# EAGLE board SP-PC-2.brd.ok (EAGLE 7.6.0)
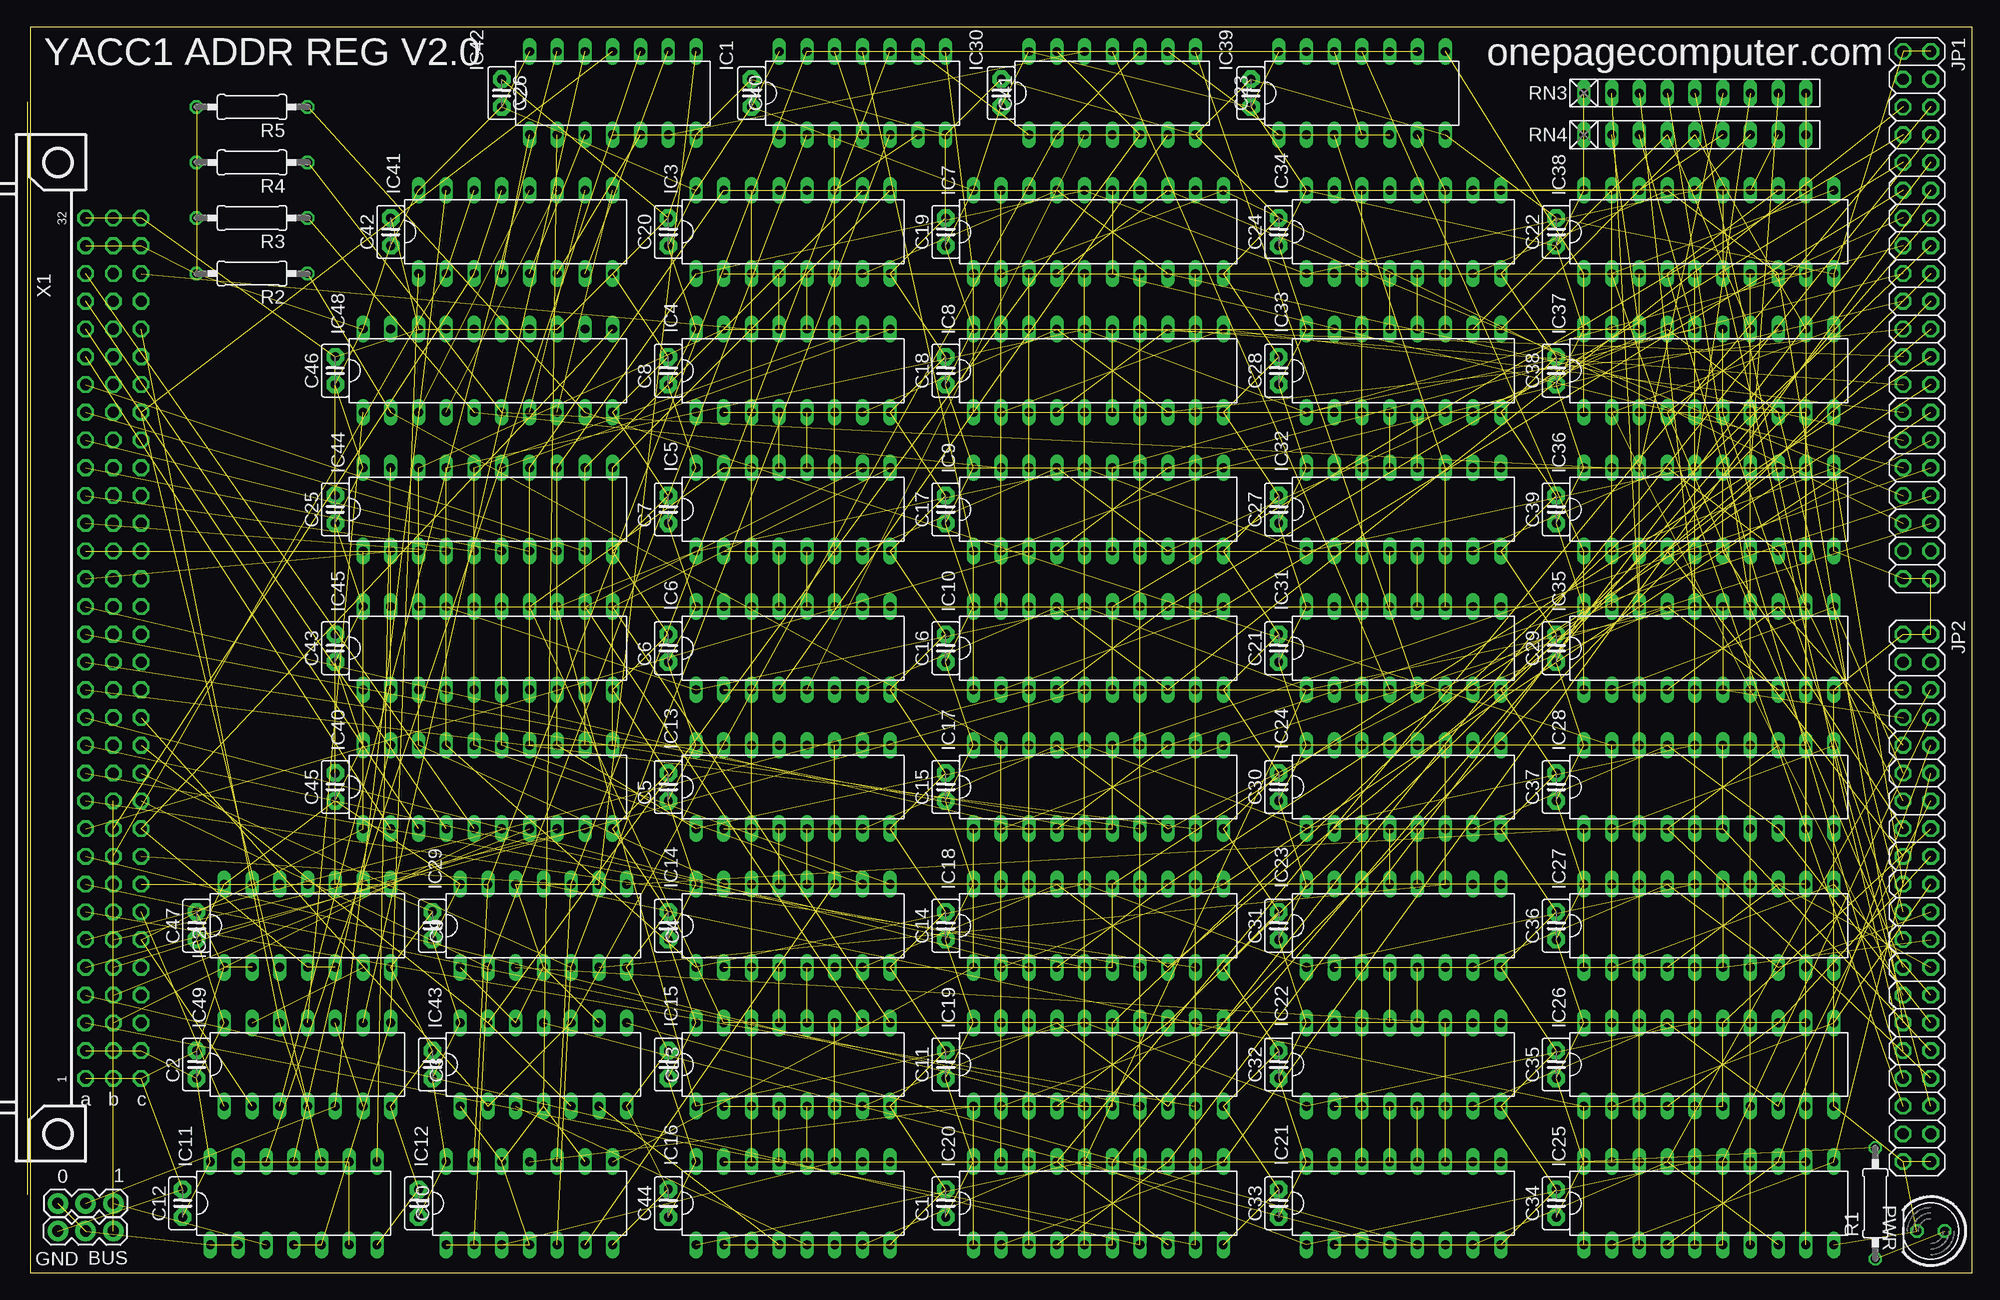
[diagram p0: board, top side]
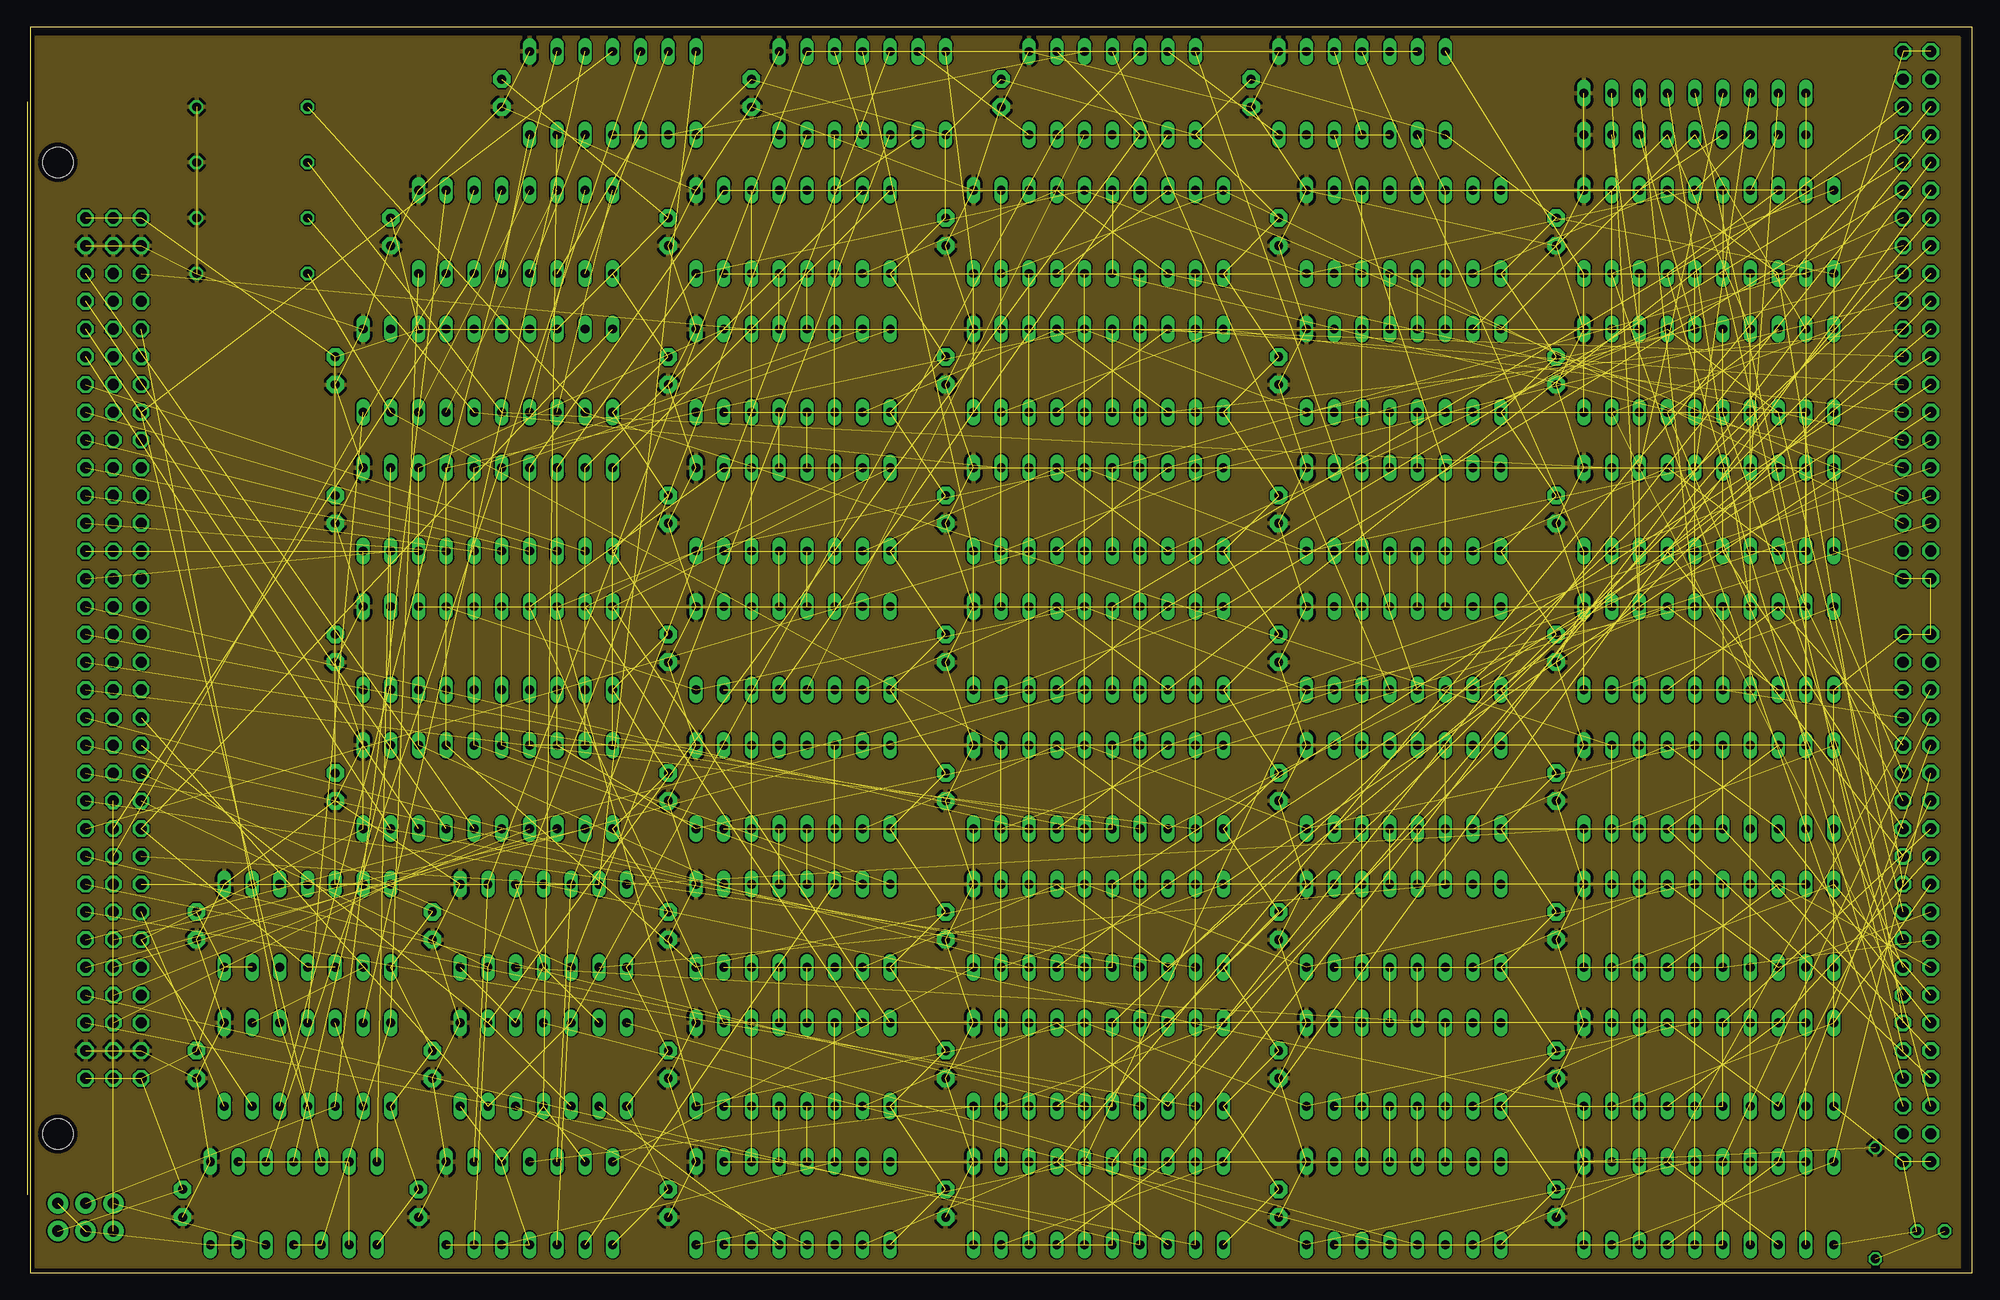
[diagram p1: board, inner layer Route2]
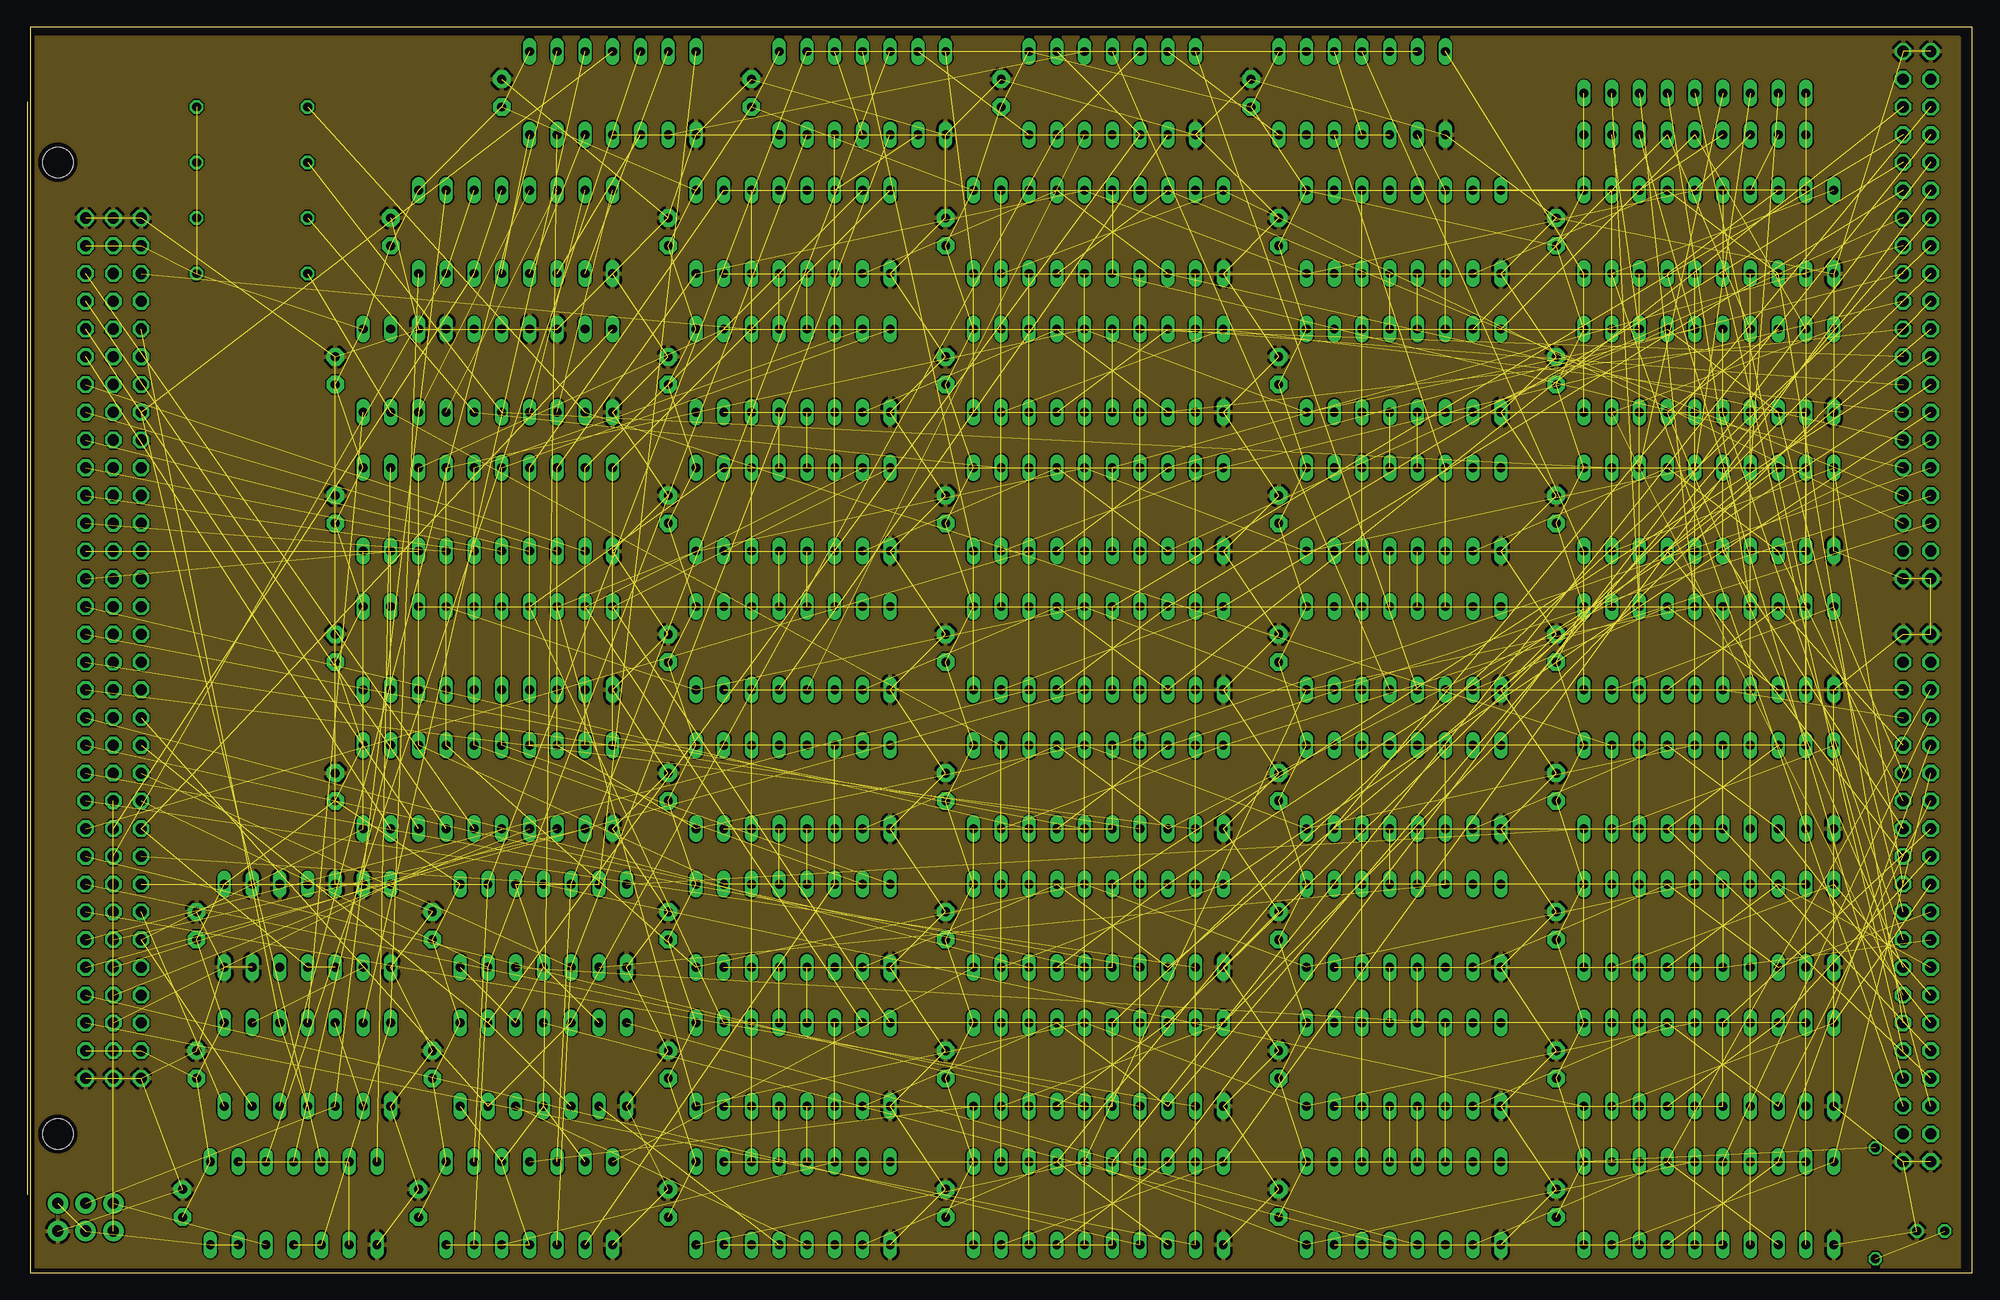
[diagram p2: board, inner layer Route15]

Size 177.78 x 113.97 mm. Coordinates in mm from the lower left corner, seen from the top.
Outline: 0,0 177.78,0 177.78,113.97 0,113.97 0,0
Copper layers (1*2*15*16): Top 0.035559375mm / dielectric 0.17018125mm / Route2 0.01778125mm / dielectric 47mil / Route15 0.01778125mm / dielectric 0.17018125mm / Bottom 0.035559375mm
Design rules "YACC1-OSHPark-4layer": minimum track width 5mil, minimum drill 10mil, track to track 5mil, track to pad 5mil, pad to pad 5mil, via to via 5mil, smd to smd 5mil, copper to edge 15mil, drill to drill 6mil, minimum pad ring 4mil, minimum via ring 4mil, stop-mask expansion 2.5mil, vias tented up to drill 0mil, thermal gap 10mil

## Footprints (pad centres in the part's own frame; a part is rotated, then mirrored left to right if it is on the bottom)
1X03 = drill 1.016 pad 1.88: 1 0,0; 2 2.54,0; 3 5.08,0
C2.5-2 = drill 0.813 pad 1.6 octagon: 1 -1.27,0; 2 1.27,0
DIL14 = drill 0.813 long: 1 -7.62,-3.81; 2 -5.08,-3.81; 3 -2.54,-3.81; 4 0,-3.81; 5 2.54,-3.81; 6 5.08,-3.81; 7 7.62,-3.81; 8 7.62,3.81; 9 5.08,3.81; 10 2.54,3.81; 11 0,3.81; 12 -2.54,3.81; 13 -5.08,3.81; 14 -7.62,3.81
DIL16 = drill 0.813 long: 1 -8.89,-3.81; 2 -6.35,-3.81; 3 -3.81,-3.81; 4 -1.27,-3.81; 5 1.27,-3.81; 6 3.81,-3.81; 7 6.35,-3.81; 8 8.89,-3.81; 9 8.89,3.81; 10 6.35,3.81; 11 3.81,3.81; 12 1.27,3.81; 13 -1.27,3.81; 14 -3.81,3.81; 15 -6.35,3.81; 16 -8.89,3.81
DIL20 = drill 0.813 long: 1 -11.43,-3.81; 2 -8.89,-3.81; 3 -6.35,-3.81; 4 -3.81,-3.81; 5 -1.27,-3.81; 6 1.27,-3.81; 7 3.81,-3.81; 8 6.35,-3.81; 9 8.89,-3.81; 10 11.43,-3.81; 11 11.43,3.81; 12 8.89,3.81; 13 6.35,3.81; 14 3.81,3.81; 15 1.27,3.81; 16 -1.27,3.81; 17 -3.81,3.81; 18 -6.35,3.81; 19 -8.89,3.81; 20 -11.43,3.81
2X20 = drill 1.016 octagon: 1 -24.13,-1.27; 2 -24.13,1.27; 3 -21.59,-1.27; 4 -21.59,1.27; 5 -19.05,-1.27; 6 -19.05,1.27; 7 -16.51,-1.27; 8 -16.51,1.27; 9 -13.97,-1.27; 10 -13.97,1.27; 11 -11.43,-1.27; 12 -11.43,1.27; 13 -8.89,-1.27; 14 -8.89,1.27; 15 -6.35,-1.27; 16 -6.35,1.27; 17 -3.81,-1.27; 18 -3.81,1.27; 19 -1.27,-1.27; 20 -1.27,1.27; 21 1.27,-1.27; 22 1.27,1.27; 23 3.81,-1.27; 24 3.81,1.27; 25 6.35,-1.27; 26 6.35,1.27; 27 8.89,-1.27; 28 8.89,1.27; 29 11.43,-1.27; 30 11.43,1.27; 31 13.97,-1.27; 32 13.97,1.27; 33 16.51,-1.27; 34 16.51,1.27; 35 19.05,-1.27; 36 19.05,1.27; 37 21.59,-1.27; 38 21.59,1.27; 39 24.13,-1.27; 40 24.13,1.27
LED5MM = drill 0.813 octagon: A -1.27,0; K 1.27,0
0207/10 = drill 0.813 octagon: 1 -5.08,0; 2 5.08,0
RN-9 = drill 0.813 long: 1 -10.16,0; 2 -7.62,0; 3 -5.08,0; 4 -2.54,0; 5 0,0; 6 2.54,0; 7 5.08,0; 8 7.62,0; 9 10.16,0
FABC96R = drill 1.016 octagon: A1 -2.54,39.37; A2 -2.54,36.83; A3 -2.54,34.29; A4 -2.54,31.75; A5 -2.54,29.21; A6 -2.54,26.67; A7 -2.54,24.13; A8 -2.54,21.59; A9 -2.54,19.05; A10 -2.54,16.51; A11 -2.54,13.97; A12 -2.54,11.43; A13 -2.54,8.89; A14 -2.54,6.35; A15 -2.54,3.81; A16 -2.54,1.27; A17 -2.54,-1.27; A18 -2.54,-3.81; A19 -2.54,-6.35; A20 -2.54,-8.89; A21 -2.54,-11.43; A22 -2.54,-13.97; A23 -2.54,-16.51; A24 -2.54,-19.05; A25 -2.54,-21.59; A26 -2.54,-24.13; A27 -2.54,-26.67; A28 -2.54,-29.21; A29 -2.54,-31.75; A30 -2.54,-34.29; A31 -2.54,-36.83; A32 -2.54,-39.37; B1 -5.08,39.37; B2 -5.08,36.83; B3 -5.08,34.29; B4 -5.08,31.75; B5 -5.08,29.21; B6 -5.08,26.67; B7 -5.08,24.13; B8 -5.08,21.59; B9 -5.08,19.05; B10 -5.08,16.51; B11 -5.08,13.97; B12 -5.08,11.43; B13 -5.08,8.89; B14 -5.08,6.35; B15 -5.08,3.81; B16 -5.08,1.27; B17 -5.08,-1.27; B18 -5.08,-3.81; B19 -5.08,-6.35; B20 -5.08,-8.89; B21 -5.08,-11.43; B22 -5.08,-13.97; B23 -5.08,-16.51; B24 -5.08,-19.05; B25 -5.08,-21.59; B26 -5.08,-24.13; B27 -5.08,-26.67; B28 -5.08,-29.21; B29 -5.08,-31.75; B30 -5.08,-34.29; B31 -5.08,-36.83; B32 -5.08,-39.37; C1 -7.62,39.37; C2 -7.62,36.83; C3 -7.62,34.29; C4 -7.62,31.75; C5 -7.62,29.21; C6 -7.62,26.67; C7 -7.62,24.13; C8 -7.62,21.59; C9 -7.62,19.05; C10 -7.62,16.51; C11 -7.62,13.97; C12 -7.62,11.43; C13 -7.62,8.89; C14 -7.62,6.35; C15 -7.62,3.81; C16 -7.62,1.27; C17 -7.62,-1.27; C18 -7.62,-3.81; C19 -7.62,-6.35; C20 -7.62,-8.89; C21 -7.62,-11.43; C22 -7.62,-13.97; C23 -7.62,-16.51; C24 -7.62,-19.05; C25 -7.62,-21.59; C26 -7.62,-24.13; C27 -7.62,-26.67; C28 -7.62,-29.21; C29 -7.62,-31.75; C30 -7.62,-34.29; C31 -7.62,-36.83; C32 -7.62,-39.37 | hole 2.794: 0,-44.456; 0,44.456

## Placement (x,y rotation side)
0  [1X03]  2.54,6.35 0 top
BUS  [1X03]  7.62,3.81 180 top
C1  0.1  [C2.5-2]  83.82,6.35 90 top
C2  0.1  [C2.5-2]  15.24,19.05 90 top
C3  0.1  [C2.5-2]  36.83,19.05 90 top
C4  0.1  [C2.5-2]  58.42,31.75 90 top
C5  0.1  [C2.5-2]  58.42,44.45 90 top
C6  0.1  [C2.5-2]  58.42,57.15 90 top
C7  0.1  [C2.5-2]  58.42,69.85 90 top
C8  0.1  [C2.5-2]  58.42,82.55 90 top
C9  0.1  [C2.5-2]  36.83,31.75 90 top
C10  0.1  [C2.5-2]  35.56,6.35 90 top
C11  0.1  [C2.5-2]  83.82,19.05 90 top
C12  0.1  [C2.5-2]  13.97,6.35 90 top
C13  0.1  [C2.5-2]  58.42,19.05 90 top
C14  0.1  [C2.5-2]  83.82,31.75 90 top
C15  0.1  [C2.5-2]  83.82,44.45 90 top
C16  0.1  [C2.5-2]  83.82,57.15 90 top
C17  0.1  [C2.5-2]  83.82,69.85 90 top
C18  0.1  [C2.5-2]  83.82,82.55 90 top
C19  0.1  [C2.5-2]  83.82,95.25 90 top
C20  0.1  [C2.5-2]  58.42,95.25 90 top
C21  0.1  [C2.5-2]  114.3,57.15 90 top
C22  0.1  [C2.5-2]  139.7,95.25 90 top
C23  0.1  [C2.5-2]  111.76,107.95 90 top
C24  0.1  [C2.5-2]  114.3,95.25 90 top
C25  0.1  [C2.5-2]  27.94,69.85 90 top
C26  0.1  [C2.5-2]  43.18,107.95 90 top
C27  0.1  [C2.5-2]  114.3,69.85 90 top
C28  0.1  [C2.5-2]  114.3,82.55 90 top
C29  0.1  [C2.5-2]  139.7,57.15 90 top
C30  0.1  [C2.5-2]  114.3,44.45 90 top
C31  0.1  [C2.5-2]  114.3,31.75 90 top
C32  0.1  [C2.5-2]  114.3,19.05 90 top
C33  0.1  [C2.5-2]  114.3,6.35 90 top
C34  0.1  [C2.5-2]  139.7,6.35 90 top
C35  0.1  [C2.5-2]  139.7,19.05 90 top
C36  0.1  [C2.5-2]  139.7,31.75 90 top
C37  0.1  [C2.5-2]  139.7,44.45 90 top
C38  0.1  [C2.5-2]  139.7,82.55 90 top
C39  0.1  [C2.5-2]  139.7,69.85 90 top
C40  0.1  [C2.5-2]  66.04,107.95 90 top
C41  0.1  [C2.5-2]  88.9,107.95 90 top
C42  0.1  [C2.5-2]  33.02,95.25 90 top
C43  0.1  [C2.5-2]  27.94,57.15 90 top
C44  0.1  [C2.5-2]  58.42,6.35 90 top
C45  0.1  [C2.5-2]  27.94,44.45 90 top
C46  0.1  [C2.5-2]  27.94,82.55 90 top
C47  0.1  [C2.5-2]  15.24,31.75 90 top
IC1  7400N  [DIL14]  76.2,107.95 0 top
IC2  7400N  [DIL14]  25.4,31.75 0 top
IC3  74LS192N  [DIL16]  69.85,95.25 0 top
IC4  74LS192N  [DIL16]  69.85,82.55 0 top
IC5  74LS192N  [DIL16]  69.85,69.85 0 top
IC6  74LS192N  [DIL16]  69.85,57.15 0 top
IC7  74LS244N  [DIL20]  97.79,95.25 0 top
IC8  74LS244N  [DIL20]  97.79,82.55 0 top
IC9  74LS244N  [DIL20]  97.79,69.85 0 top
IC10  74LS244N  [DIL20]  97.79,57.15 0 top
IC11  7400N  [DIL14]  24.13,6.35 0 top
IC12  7400N  [DIL14]  45.72,6.35 0 top
IC13  74LS192N  [DIL16]  69.85,44.45 0 top
IC14  74LS192N  [DIL16]  69.85,31.75 0 top
IC15  74LS192N  [DIL16]  69.85,19.05 0 top
IC16  74LS192N  [DIL16]  69.85,6.35 0 top
IC17  74LS244N  [DIL20]  97.79,44.45 0 top
IC18  74LS244N  [DIL20]  97.79,31.75 0 top
IC19  74LS244N  [DIL20]  97.79,19.05 0 top
IC20  74LS244N  [DIL20]  97.79,6.35 0 top
IC21  74LS192N  [DIL16]  125.73,6.35 0 top
IC22  74LS192N  [DIL16]  125.73,19.05 0 top
IC23  74LS192N  [DIL16]  125.73,31.75 0 top
IC24  74LS192N  [DIL16]  125.73,44.45 0 top
IC25  74LS244N  [DIL20]  153.67,6.35 0 top
IC26  74LS244N  [DIL20]  153.67,19.05 0 top
IC27  74LS244N  [DIL20]  153.67,31.75 0 top
IC28  74LS244N  [DIL20]  153.67,44.45 0 top
IC29  7400N  [DIL14]  46.99,31.75 0 top
IC30  7400N  [DIL14]  99.06,107.95 0 top
IC31  74LS192N  [DIL16]  125.73,57.15 0 top
IC32  74LS192N  [DIL16]  125.73,69.85 0 top
IC33  74LS192N  [DIL16]  125.73,82.55 0 top
IC34  74LS192N  [DIL16]  125.73,95.25 0 top
IC35  74LS244N  [DIL20]  153.67,57.15 0 top
IC36  74LS244N  [DIL20]  153.67,69.85 0 top
IC37  74LS244N  [DIL20]  153.67,82.55 0 top
IC38  74LS244N  [DIL20]  153.67,95.25 0 top
IC39  7400N  [DIL14]  121.92,107.95 0 top
IC40  74LS245N  [DIL20]  41.91,44.45 0 top
IC41  74LS139N  [DIL16]  44.45,95.25 0 top
IC42  74LS04N  [DIL14]  53.34,107.95 0 top
IC43  7400N  [DIL14]  46.99,19.05 0 top
IC44  74LS245N  [DIL20]  41.91,69.85 0 top
IC45  74LS245N  [DIL20]  41.91,57.15 0 top
IC48  74LS374N  [DIL20]  41.91,82.55 0 top
IC49  74LS32N  [DIL14]  25.4,19.05 0 top
JP1  [2X20]  172.72,87.63 270 top
JP2  [2X20]  172.72,34.29 270 top
PWR  l1  [LED5MM]  173.99,3.81 180 top
R1  330  [0207/10]  168.91,6.35 90 top
R2  10k  [0207/10]  20.32,91.44 180 top
R3  10k  [0207/10]  20.32,96.52 180 top
R4  10k  [0207/10]  20.32,101.6 180 top
R5  10k  [0207/10]  20.32,106.68 180 top
RN3  [RN-9]  152.4,107.95 0 top
RN4  [RN-9]  152.4,104.14 0 top
X1  FABC96R  [FABC96R]  2.54,57.15 180 top

## Library data of the parts
0 BUS = SparkFun-Connectors
C1-C47 = capacitor-wima
IC1-IC45 IC48 IC49 = 74xx-us
JP1 JP2 = pinhead
PWR = led
R1 = eagle-ltspice; SPICEMODEL: NONE; SPICEPREFIX: R
R2-R5 = resistor
RN3 RN4 = resistor-net; OC_FARNELL: unknown; OC_NEWARK: unknown
X1 = con-vg

## Nets
-ADDR-ID2-SEL: 0.3 IC11.3
-BRD-SEL: 0.2 IC41.15 IC49.5
-BUS-EN: IC49.4 IC49.12 X1.C28
-INDIRECT0: IC41.6 IC42.5
-INDIRECT1: IC41.7 IC42.9
-IREG0-ADDR-OUT: IC35.19 IC36.19 IC37.19 IC38.19 IC48.6 R4.1
-IREG1-ADDR-OUT: IC25.19 IC26.19 IC27.19 IC28.19 IC48.9 R5.1
-PC-ADDR-OUT: IC17.19 IC18.19 IC19.19 IC20.19 IC48.2 R2.1
-SP: IC41.5 IC42.3
-SP-ADDR-OUT: IC7.19 IC8.19 IC9.19 IC10.19 IC48.5 R3.1
-SPC: IC41.4 IC42.1
AC-LD: X1.C21
AC-LD-INV: X1.C20
AC-RD: X1.C22
ADATA0: IC6.15 IC10.18 IC16.15 IC20.18 IC21.15 IC25.18 IC31.15 IC35.18 IC45.18 RN3.2
ADATA1: IC6.1 IC10.16 IC16.1 IC20.16 IC21.1 IC25.16 IC31.1 IC35.16 IC45.17 RN3.3
ADATA2: IC6.10 IC10.14 IC16.10 IC20.14 IC21.10 IC25.14 IC31.10 IC35.14 IC45.16 RN3.4
ADATA3: IC6.9 IC10.12 IC16.9 IC20.12 IC21.9 IC25.12 IC31.9 IC35.12 IC45.15 RN3.5
ADATA4: IC5.15 IC9.18 IC15.15 IC19.18 IC22.15 IC26.18 IC32.15 IC36.18 IC45.14 RN3.6
ADATA5: IC5.1 IC9.16 IC15.1 IC19.16 IC22.1 IC26.16 IC32.1 IC36.16 IC45.13 RN3.7
ADATA6: IC5.10 IC9.14 IC15.10 IC19.14 IC22.10 IC26.14 IC32.10 IC36.14 IC45.12 RN3.8
ADATA7: IC5.9 IC9.12 IC15.9 IC19.12 IC22.9 IC26.12 IC32.9 IC36.12 IC45.11 RN3.9
ADATA8: IC4.15 IC8.18 IC14.15 IC18.18 IC23.15 IC27.18 IC33.15 IC37.18 IC40.18 IC44.18 RN4.2
ADATA9: IC4.1 IC8.16 IC14.1 IC18.16 IC23.1 IC27.16 IC33.1 IC37.16 IC40.17 IC44.17 RN4.3
ADATA10: IC4.10 IC8.14 IC14.10 IC18.14 IC23.10 IC27.14 IC33.10 IC37.14 IC40.16 IC44.16 RN4.4
ADATA11: IC4.9 IC8.12 IC14.9 IC18.12 IC23.9 IC27.12 IC33.9 IC37.12 IC40.15 IC44.15 RN4.5
ADATA12: IC3.15 IC7.18 IC13.15 IC17.18 IC24.15 IC28.18 IC34.15 IC38.18 IC40.14 IC44.14 RN4.6
ADATA13: IC3.1 IC7.16 IC13.1 IC17.16 IC24.1 IC28.16 IC34.1 IC38.16 IC40.13 IC44.13 RN4.7
ADATA14: IC3.10 IC7.14 IC13.10 IC17.14 IC24.10 IC28.14 IC34.10 IC38.14 IC40.12 IC44.12 RN4.8
ADATA15: IC3.9 IC7.12 IC13.9 IC17.12 IC24.9 IC28.12 IC34.9 IC38.12 IC40.11 IC44.11 RN4.9
ADDR0: IC10.9 IC20.9 IC25.9 IC35.9 X1.A3
ADDR1: IC10.7 IC20.7 IC25.7 IC35.7 X1.A4
ADDR2: IC10.5 IC20.5 IC25.5 IC35.5 X1.A5
ADDR3: IC10.3 IC20.3 IC25.3 IC35.3 X1.A6
ADDR4: IC9.9 IC19.9 IC26.9 IC36.9 X1.A7
ADDR5: IC9.7 IC19.7 IC26.7 IC36.7 X1.A8
ADDR6: IC9.5 IC19.5 IC26.5 IC36.5 X1.A9
ADDR7: IC9.3 IC19.3 IC26.3 IC36.3 X1.A10
ADDR8: IC8.9 IC18.9 IC27.9 IC37.9 X1.A11
ADDR9: IC8.7 IC18.7 IC27.7 IC37.7 X1.A12
ADDR10: IC8.5 IC18.5 IC27.5 IC37.5 X1.A13
ADDR11: IC8.3 IC18.3 IC27.3 IC37.3 X1.A14
ADDR12: IC7.9 IC17.9 IC28.9 IC38.9 X1.A15
ADDR13: IC7.7 IC17.7 IC28.7 IC38.7 X1.A16
ADDR14: IC7.5 IC17.5 IC28.5 IC38.5 X1.A17
ADDR15: IC7.3 IC17.3 IC28.3 IC38.3 X1.A18
ADDR-ID0: IC41.2 IC41.14 X1.B9
ADDR-ID1: IC41.3 IC41.13 X1.B10
ADDR-ID2-SEL: 0.1 BUS.2 IC11.1 IC11.2
ADDR-REG-ADDR-RD: IC2.4 IC2.5 IC48.11 X1.C10
ADDR-REG-DATA-RD-HI: IC1.10 IC12.10 IC29.10 IC39.10 X1.C9
ADDR-REG-DATA-RD-LO: IC1.13 IC12.13 IC29.13 IC39.13 X1.C8
ADDR-REG-DN: IC30.5 IC30.13 IC43.5 IC43.13 X1.C13
ADDR-REG-FUNC: IC11.6 IC11.9 IC11.13
ADDR-REG-FUNC-LD: IC40.1 IC44.1 IC45.1 IC49.2 X1.C6
ADDR-REG-FUNC-RD: IC49.1 X1.C7
ADDR-REG-LD-HI: IC1.5 IC12.5 IC29.5 IC39.5 X1.C12
ADDR-REG-LD-LO: IC1.2 IC12.2 IC29.2 IC39.2 X1.C11
ADDR-REG-UP: IC30.2 IC30.10 IC43.2 IC43.10 X1.C14
ALU0: X1.C16
ALU1: X1.C17
ALU2: X1.C18
ALU3: X1.C19
ALU-FUNC: X1.C15
BR-COND: X1.C24
DATA0: IC44.2 IC45.2 X1.A19
DATA1: IC44.3 IC45.3 X1.A20
DATA2: IC44.4 IC45.4 X1.A21
DATA3: IC44.5 IC45.5 X1.A22
DATA4: IC44.6 IC45.6 X1.A23
DATA5: IC44.7 IC45.7 X1.A24
DATA6: IC44.8 IC45.8 X1.A25
DATA7: IC44.9 IC45.9 X1.A26
DATA8: IC40.2 X1.A27
DATA9: IC40.3 X1.A28
DATA10: IC40.4 X1.A29
DATA11: IC40.5 X1.A30
DATA12: IC40.6 X1.B3
DATA13: IC40.7 X1.B4
DATA14: IC40.8 X1.B5
DATA15: IC40.9 X1.B6
GND: BUS.3 C1.2 C2.2 C3.2 C4.2 C5.2 C6.2 C7.2 C8.2 C9.2 C10.2 C11.2 C12.2 C13.2 C14.2 C15.2 C16.2 C17.2 C18.2 C19.2 C20.2 C21.2 C22.2 C23.2 C24.2 C25.2 C26.2 C27.2 C28.2 C29.2 C30.2 C31.2 C32.2 C33.2 C34.2 C35.2 C36.2 C37.2 C38.2 C39.2 C40.2 C41.2 C42.2 C43.2 C44.2 C45.2 C46.2 C47.2 IC1.7 IC2.1 IC2.2 IC2.7 IC2.9 IC2.10 IC2.12 IC2.13 IC3.8 IC4.8 IC5.8 IC6.8 IC7.10 IC8.10 IC9.10 IC10.10 IC11.7 IC12.7 IC13.8 IC14.8 IC15.8 IC16.8 IC17.10 IC18.10 IC19.10 IC20.10 IC21.8 IC22.8 IC23.8 IC24.8 IC25.10 IC26.10 IC27.10 IC28.10 IC29.7 IC30.7 IC31.8 IC32.8 IC33.8 IC34.8 IC35.10 IC36.10 IC37.10 IC38.10 IC39.7 IC40.10 IC41.8 IC42.7 IC43.7 IC44.10 IC45.10 IC48.10 IC48.13 IC48.14 IC48.17 IC48.18 IC49.7 JP1.1 JP1.2 JP1.39 JP1.40 JP2.1 JP2.2 JP2.39 JP2.40 PWR.K X1.A1 X1.A32 X1.B1 X1.B32 X1.C1 X1.C32
H/L-SWAP: IC11.10 IC42.11 X1.C25
I/O-ADDR: X1.B28
I/O-RD: X1.B27
I/O-WR: X1.B26
IN: X1.C26
INT: X1.B29
INTA: X1.B30
IREG0: IC30.9 IC30.12 IC39.1 IC39.4 IC39.9 IC39.12 IC42.6
IREG1: IC29.1 IC29.4 IC29.9 IC29.12 IC42.8 IC43.9 IC43.12
MEM-RD: X1.B25
MEM-WR: X1.B24
N$1: IC42.12 IC49.9
N$2: IC21.13 IC22.4
N$3: IC21.12 IC22.5
N$4: IC22.13 IC23.4
N$5: IC22.12 IC23.5
N$6: IC23.13 IC24.4
N$7: IC23.12 IC24.5
N$8: IC21.11 IC22.11 IC29.3
N$9: IC21.5 IC43.8
N$10: IC5.4 IC6.13
N$11: IC5.5 IC6.12
N$12: IC4.4 IC5.13
N$13: IC4.5 IC5.12
N$14: IC3.4 IC4.13
N$15: IC3.5 IC4.12
N$16: IC1.3 IC5.11 IC6.11
N$17: IC6.5 IC30.3
N$18: IC6.4 IC30.6
N$20: IC1.11 IC9.1 IC10.1
N$21: IC1.8 IC7.1 IC8.1
N$22: IC1.6 IC3.11 IC4.11
N$23: IC21.4 IC43.11
N$25: IC25.1 IC26.1 IC29.11
N$26: IC27.1 IC28.1 IC29.8
N$27: IC23.11 IC24.11 IC29.6
N$28: IC31.13 IC32.4
N$29: IC31.12 IC32.5
N$30: IC32.13 IC33.4
N$31: IC32.12 IC33.5
N$32: IC33.13 IC34.4
N$33: IC33.12 IC34.5
N$34: IC31.11 IC32.11 IC39.3
N$35: IC30.8 IC31.5
N$36: IC30.11 IC31.4
N$37: IC11.4 IC11.5 IC41.1 IC49.8
N$38: IC35.1 IC36.1 IC39.11
N$39: IC37.1 IC38.1 IC39.8
N$40: IC33.11 IC34.11 IC39.6
N$41: IC49.6 IC49.10
N$42: IC11.11 IC40.19 IC45.19
N$43: IC41.12 IC48.3
N$44: IC11.8 IC44.19
N$45: IC11.12 IC42.10
N$46: IC41.11 IC48.4
N$47: IC48.1 IC49.11
N$48: IC41.10 IC48.7
N$49: IC41.9 IC48.8
N$50: IC2.6 IC49.13
N$51: PWR.A R1.1
N$58: IC15.4 IC16.13
N$59: IC15.5 IC16.12
N$60: IC14.4 IC15.13
N$61: IC14.5 IC15.12
N$62: IC13.4 IC14.13
N$63: IC13.5 IC14.12
N$64: IC12.3 IC15.11 IC16.11
N$65: IC16.5 IC43.3
N$66: IC16.4 IC43.6
N$84: IC12.11 IC19.1 IC20.1
N$85: IC12.8 IC17.1 IC18.1
N$86: IC12.6 IC13.11 IC14.11
OUT: X1.C27
PC: IC12.1 IC12.4 IC12.9 IC12.12 IC42.2 IC43.1 IC43.4
R0D0: IC6.7 IC10.8 IC10.17 JP1.5
R0D1: IC6.6 IC10.6 IC10.15 JP1.7
R0D2: IC6.2 IC10.4 IC10.13 JP1.9
R0D3: IC6.3 IC10.2 IC10.11 JP1.11
R0D4: IC5.7 IC9.8 IC9.17 JP1.13
R0D5: IC5.6 IC9.6 IC9.15 JP1.15
R0D6: IC5.2 IC9.4 IC9.13 JP1.17
R0D7: IC5.3 IC9.2 IC9.11 JP1.19
R0D8: IC4.7 IC8.8 IC8.17 JP1.21
R0D9: IC4.6 IC8.6 IC8.15 JP1.23
R0D10: IC4.2 IC8.4 IC8.13 JP1.25
R0D11: IC4.3 IC8.2 IC8.11 JP1.27
R0D12: IC3.7 IC7.8 IC7.17 JP1.29
R0D13: IC3.6 IC7.6 IC7.15 JP1.31
R0D14: IC3.2 IC7.4 IC7.13 JP1.33
R0D15: IC3.3 IC7.2 IC7.11 JP1.35
R1D0: IC16.7 IC20.8 IC20.17 JP1.6
R1D1: IC16.6 IC20.6 IC20.15 JP1.8
R1D2: IC16.2 IC20.4 IC20.13 JP1.10
R1D3: IC16.3 IC20.2 IC20.11 JP1.12
R1D4: IC15.7 IC19.8 IC19.17 JP1.14
R1D5: IC15.6 IC19.6 IC19.15 JP1.16
R1D6: IC15.2 IC19.4 IC19.13 JP1.18
R1D7: IC15.3 IC19.2 IC19.11 JP1.20
R1D8: IC14.7 IC18.8 IC18.17 JP1.22
R1D9: IC14.6 IC18.6 IC18.15 JP1.24
R1D10: IC14.2 IC18.4 IC18.13 JP1.26
R1D11: IC14.3 IC18.2 IC18.11 JP1.28
R1D12: IC13.7 IC17.8 IC17.17 JP1.30
R1D13: IC13.6 IC17.6 IC17.15 JP1.32
R1D14: IC13.2 IC17.4 IC17.13 JP1.34
R1D15: IC13.3 IC17.2 IC17.11 JP1.36
R2D0: IC31.7 IC35.8 IC35.17 JP2.5
R2D1: IC31.6 IC35.6 IC35.15 JP2.7
R2D2: IC31.2 IC35.4 IC35.13 JP2.9
R2D3: IC31.3 IC35.2 IC35.11 JP2.11
R2D4: IC32.7 IC36.8 IC36.17 JP2.13
R2D5: IC32.6 IC36.6 IC36.15 JP2.15
R2D6: IC32.2 IC36.4 IC36.13 JP2.17
R2D7: IC32.3 IC36.2 IC36.11 JP2.19
R2D8: IC33.7 IC37.8 IC37.17 JP2.21
R2D9: IC33.6 IC37.6 IC37.15 JP2.23
R2D10: IC33.2 IC37.4 IC37.13 JP2.25
R2D11: IC33.3 IC37.2 IC37.11 JP2.27
R2D12: IC34.7 IC38.8 IC38.17 JP2.29
R2D13: IC34.6 IC38.6 IC38.15 JP2.31
R2D14: IC34.2 IC38.4 IC38.13 JP2.33
R2D15: IC34.3 IC38.2 IC38.11 JP2.35
R3D0: IC21.7 IC25.8 IC25.17 JP2.6
R3D1: IC21.6 IC25.6 IC25.15 JP2.8
R3D2: IC21.2 IC25.4 IC25.13 JP2.10
R3D3: IC21.3 IC25.2 IC25.11 JP2.12
R3D4: IC22.7 IC26.8 IC26.17 JP2.14
R3D5: IC22.6 IC26.6 IC26.15 JP2.16
R3D6: IC22.2 IC26.4 IC26.13 JP2.18
R3D7: IC22.3 IC26.2 IC26.11 JP2.20
R3D8: IC23.7 IC27.8 IC27.17 JP2.22
R3D9: IC23.6 IC27.6 IC27.15 JP2.24
R3D10: IC23.2 IC27.4 IC27.13 JP2.26
R3D11: IC23.3 IC27.2 IC27.11 JP2.28
R3D12: IC24.7 IC28.8 IC28.17 JP2.30
R3D13: IC24.6 IC28.6 IC28.15 JP2.32
R3D14: IC24.2 IC28.4 IC28.13 JP2.34
R3D15: IC24.3 IC28.2 IC28.11 JP2.36
RD-OR-LD: IC42.13 IC49.3
REG-BRD-LD-ID: X1.B16
REG-BRD-RD-ID: X1.B12
REG-FUNC-LD: X1.B7
REG-FUNC-RD: X1.B8
REG-LD-HI: X1.B23
REG-LD-ID0: X1.B17
REG-LD-ID1: X1.B18
REG-LD-ID2: X1.B19
REG-LD-LO: X1.B21
REG-RD-HI: X1.B22
REG-RD-ID0: X1.B13
REG-RD-ID1: X1.B14
REG-RD-ID2: X1.B15
REG-RD-LO: X1.B20
RESET: IC3.14 IC4.14 IC5.14 IC6.14 IC13.14 IC14.14 IC15.14 IC16.14 IC21.14 IC22.14 IC23.14 IC24.14 IC31.14 IC32.14 IC33.14 IC34.14 X1.C30
RUN: X1.C29
SP: IC1.1 IC1.4 IC1.9 IC1.12 IC30.1 IC30.4 IC42.4
SR-LD: X1.C23
TMP-REG-LD: X1.C3
TMP-REG-RD: X1.C4
UNUSED1: BUS.1 X1.B11
UNUSED2: X1.C5
VCC: C1.1 C2.1 C3.1 C4.1 C5.1 C6.1 C7.1 C8.1 C9.1 C10.1 C11.1 C12.1 C13.1 C14.1 C15.1 C16.1 C17.1 C18.1 C19.1 C20.1 C21.1 C22.1 C23.1 C24.1 C25.1 C26.1 C27.1 C28.1 C29.1 C30.1 C31.1 C32.1 C33.1 C34.1 C35.1 C36.1 C37.1 C38.1 C39.1 C40.1 C41.1 C42.1 C43.1 C44.1 C45.1 C46.1 C47.1 IC1.14 IC2.14 IC3.16 IC4.16 IC5.16 IC6.16 IC7.20 IC8.20 IC9.20 IC10.20 IC11.14 IC12.14 IC13.16 IC14.16 IC15.16 IC16.16 IC17.20 IC18.20 IC19.20 IC20.20 IC21.16 IC22.16 IC23.16 IC24.16 IC25.20 IC26.20 IC27.20 IC28.20 IC29.14 IC30.14 IC31.16 IC32.16 IC33.16 IC34.16 IC35.20 IC36.20 IC37.20 IC38.20 IC39.14 IC40.20 IC41.16 IC42.14 IC43.14 IC44.20 IC45.20 IC48.20 IC49.14 R1.2 R2.2 R3.2 R4.2 R5.2 RN3.1 RN4.1 X1.A2 X1.A31 X1.B2 X1.B31 X1.C2 X1.C31

## Tracks (layer width: path | path; a pad name or v marks a point on that pad's centre or on a via)
-ADDR-ID2-SEL  (1 unrouted)
-BRD-SEL  (2 unrouted)
-BUS-EN  (2 unrouted)
-INDIRECT0  (1 unrouted)
-INDIRECT1  (1 unrouted)
-IREG0-ADDR-OUT  (5 unrouted)
-IREG1-ADDR-OUT  (5 unrouted)
-PC-ADDR-OUT  (5 unrouted)
-SP  (1 unrouted)
-SP-ADDR-OUT  (5 unrouted)
-SPC  (1 unrouted)
ADATA0  (9 unrouted)
ADATA1  (9 unrouted)
ADATA2  (9 unrouted)
ADATA3  (9 unrouted)
ADATA4  (9 unrouted)
ADATA5  (9 unrouted)
ADATA6  (9 unrouted)
ADATA7  (9 unrouted)
ADATA8  (10 unrouted)
ADATA9  (10 unrouted)
ADATA10  (10 unrouted)
ADATA11  (10 unrouted)
ADATA12  (10 unrouted)
ADATA13  (10 unrouted)
ADATA14  (10 unrouted)
ADATA15  (10 unrouted)
ADDR0  (4 unrouted)
ADDR1  (4 unrouted)
ADDR2  (4 unrouted)
ADDR3  (4 unrouted)
ADDR4  (4 unrouted)
ADDR5  (4 unrouted)
ADDR6  (4 unrouted)
ADDR7  (4 unrouted)
ADDR8  (4 unrouted)
ADDR9  (4 unrouted)
ADDR10  (4 unrouted)
ADDR11  (4 unrouted)
ADDR12  (4 unrouted)
ADDR13  (4 unrouted)
ADDR14  (4 unrouted)
ADDR15  (4 unrouted)
ADDR-ID0  (2 unrouted)
ADDR-ID1  (2 unrouted)
ADDR-ID2-SEL  (3 unrouted)
ADDR-REG-ADDR-RD  (3 unrouted)
ADDR-REG-DATA-RD-HI  (4 unrouted)
ADDR-REG-DATA-RD-LO  (4 unrouted)
ADDR-REG-DN  (4 unrouted)
ADDR-REG-FUNC  (2 unrouted)
ADDR-REG-FUNC-LD  (4 unrouted)
ADDR-REG-FUNC-RD  (1 unrouted)
ADDR-REG-LD-HI  (4 unrouted)
ADDR-REG-LD-LO  (4 unrouted)
ADDR-REG-UP  (4 unrouted)
DATA0  (2 unrouted)
DATA1  (2 unrouted)
DATA2  (2 unrouted)
DATA3  (2 unrouted)
DATA4  (2 unrouted)
DATA5  (2 unrouted)
DATA6  (2 unrouted)
DATA7  (2 unrouted)
DATA8  (1 unrouted)
DATA9  (1 unrouted)
DATA10  (1 unrouted)
DATA11  (1 unrouted)
DATA12  (1 unrouted)
DATA13  (1 unrouted)
DATA14  (1 unrouted)
DATA15  (1 unrouted)
GND  (119 unrouted)
  pour Route15: 1.27,113.03 176.53,113.03 176.53,0 0,0 0,113.03
H/L-SWAP  (2 unrouted)
IREG0  (6 unrouted)
IREG1  (6 unrouted)
N$1  (1 unrouted)
N$2  (1 unrouted)
N$3  (1 unrouted)
N$4  (1 unrouted)
N$5  (1 unrouted)
N$6  (1 unrouted)
N$7  (1 unrouted)
N$8  (2 unrouted)
N$9  (1 unrouted)
N$10  (1 unrouted)
N$11  (1 unrouted)
N$12  (1 unrouted)
N$13  (1 unrouted)
N$14  (1 unrouted)
N$15  (1 unrouted)
N$16  (2 unrouted)
N$17  (1 unrouted)
N$18  (1 unrouted)
N$20  (2 unrouted)
N$21  (2 unrouted)
N$22  (2 unrouted)
N$23  (1 unrouted)
N$25  (2 unrouted)
N$26  (2 unrouted)
N$27  (2 unrouted)
N$28  (1 unrouted)
N$29  (1 unrouted)
N$30  (1 unrouted)
N$31  (1 unrouted)
N$32  (1 unrouted)
N$33  (1 unrouted)
N$34  (2 unrouted)
N$35  (1 unrouted)
N$36  (1 unrouted)
N$37  (3 unrouted)
N$38  (2 unrouted)
N$39  (2 unrouted)
N$40  (2 unrouted)
N$41  (1 unrouted)
N$42  (2 unrouted)
N$43  (1 unrouted)
N$44  (1 unrouted)
N$45  (1 unrouted)
N$46  (1 unrouted)
N$47  (1 unrouted)
N$48  (1 unrouted)
N$49  (1 unrouted)
N$50  (1 unrouted)
N$51  (1 unrouted)
N$58  (1 unrouted)
N$59  (1 unrouted)
N$60  (1 unrouted)
N$61  (1 unrouted)
N$62  (1 unrouted)
N$63  (1 unrouted)
N$64  (2 unrouted)
N$65  (1 unrouted)
N$66  (1 unrouted)
N$84  (2 unrouted)
N$85  (2 unrouted)
N$86  (2 unrouted)
PC  (6 unrouted)
R0D0  (3 unrouted)
R0D1  (3 unrouted)
R0D2  (3 unrouted)
R0D3  (3 unrouted)
R0D4  (3 unrouted)
R0D5  (3 unrouted)
R0D6  (3 unrouted)
R0D7  (3 unrouted)
R0D8  (3 unrouted)
R0D9  (3 unrouted)
R0D10  (3 unrouted)
R0D11  (3 unrouted)
R0D12  (3 unrouted)
R0D13  (3 unrouted)
R0D14  (3 unrouted)
R0D15  (3 unrouted)
R1D0  (3 unrouted)
R1D1  (3 unrouted)
R1D2  (3 unrouted)
R1D3  (3 unrouted)
R1D4  (3 unrouted)
R1D5  (3 unrouted)
R1D6  (3 unrouted)
R1D7  (3 unrouted)
R1D8  (3 unrouted)
R1D9  (3 unrouted)
R1D10  (3 unrouted)
R1D11  (3 unrouted)
R1D12  (3 unrouted)
R1D13  (3 unrouted)
R1D14  (3 unrouted)
R1D15  (3 unrouted)
R2D0  (3 unrouted)
R2D1  (3 unrouted)
R2D2  (3 unrouted)
R2D3  (3 unrouted)
R2D4  (3 unrouted)
R2D5  (3 unrouted)
R2D6  (3 unrouted)
R2D7  (3 unrouted)
R2D8  (3 unrouted)
R2D9  (3 unrouted)
R2D10  (3 unrouted)
R2D11  (3 unrouted)
R2D12  (3 unrouted)
R2D13  (3 unrouted)
R2D14  (3 unrouted)
R2D15  (3 unrouted)
R3D0  (3 unrouted)
R3D1  (3 unrouted)
R3D2  (3 unrouted)
R3D3  (3 unrouted)
R3D4  (3 unrouted)
R3D5  (3 unrouted)
R3D6  (3 unrouted)
R3D7  (3 unrouted)
R3D8  (3 unrouted)
R3D9  (3 unrouted)
R3D10  (3 unrouted)
R3D11  (3 unrouted)
R3D12  (3 unrouted)
R3D13  (3 unrouted)
R3D14  (3 unrouted)
R3D15  (3 unrouted)
RD-OR-LD  (1 unrouted)
RESET  (16 unrouted)
SP  (6 unrouted)
UNUSED1  (1 unrouted)
VCC  (106 unrouted)
  pour Route2: 0,113.03 176.53,113.03 176.53,0 0,0

## Text on the board
tNames: YACC1 ADDR REG V2.0 | onepagecomputer.com | 1 | GND
tCream: 1